# Altium PCB LeBot.PcbDoc (part 1 of 2)
Units mm, origin at the board's own origin, x right, y up, seen from the top; angles counter-clockwise.
Board outline 72.75 x 51.14 mm, 4 copper layers (Top Layer, Low Impedance, Power, Bottom Layer), stack 0.778 mm thick; 105 components, 96 nets, 418 pads, 258 vias.
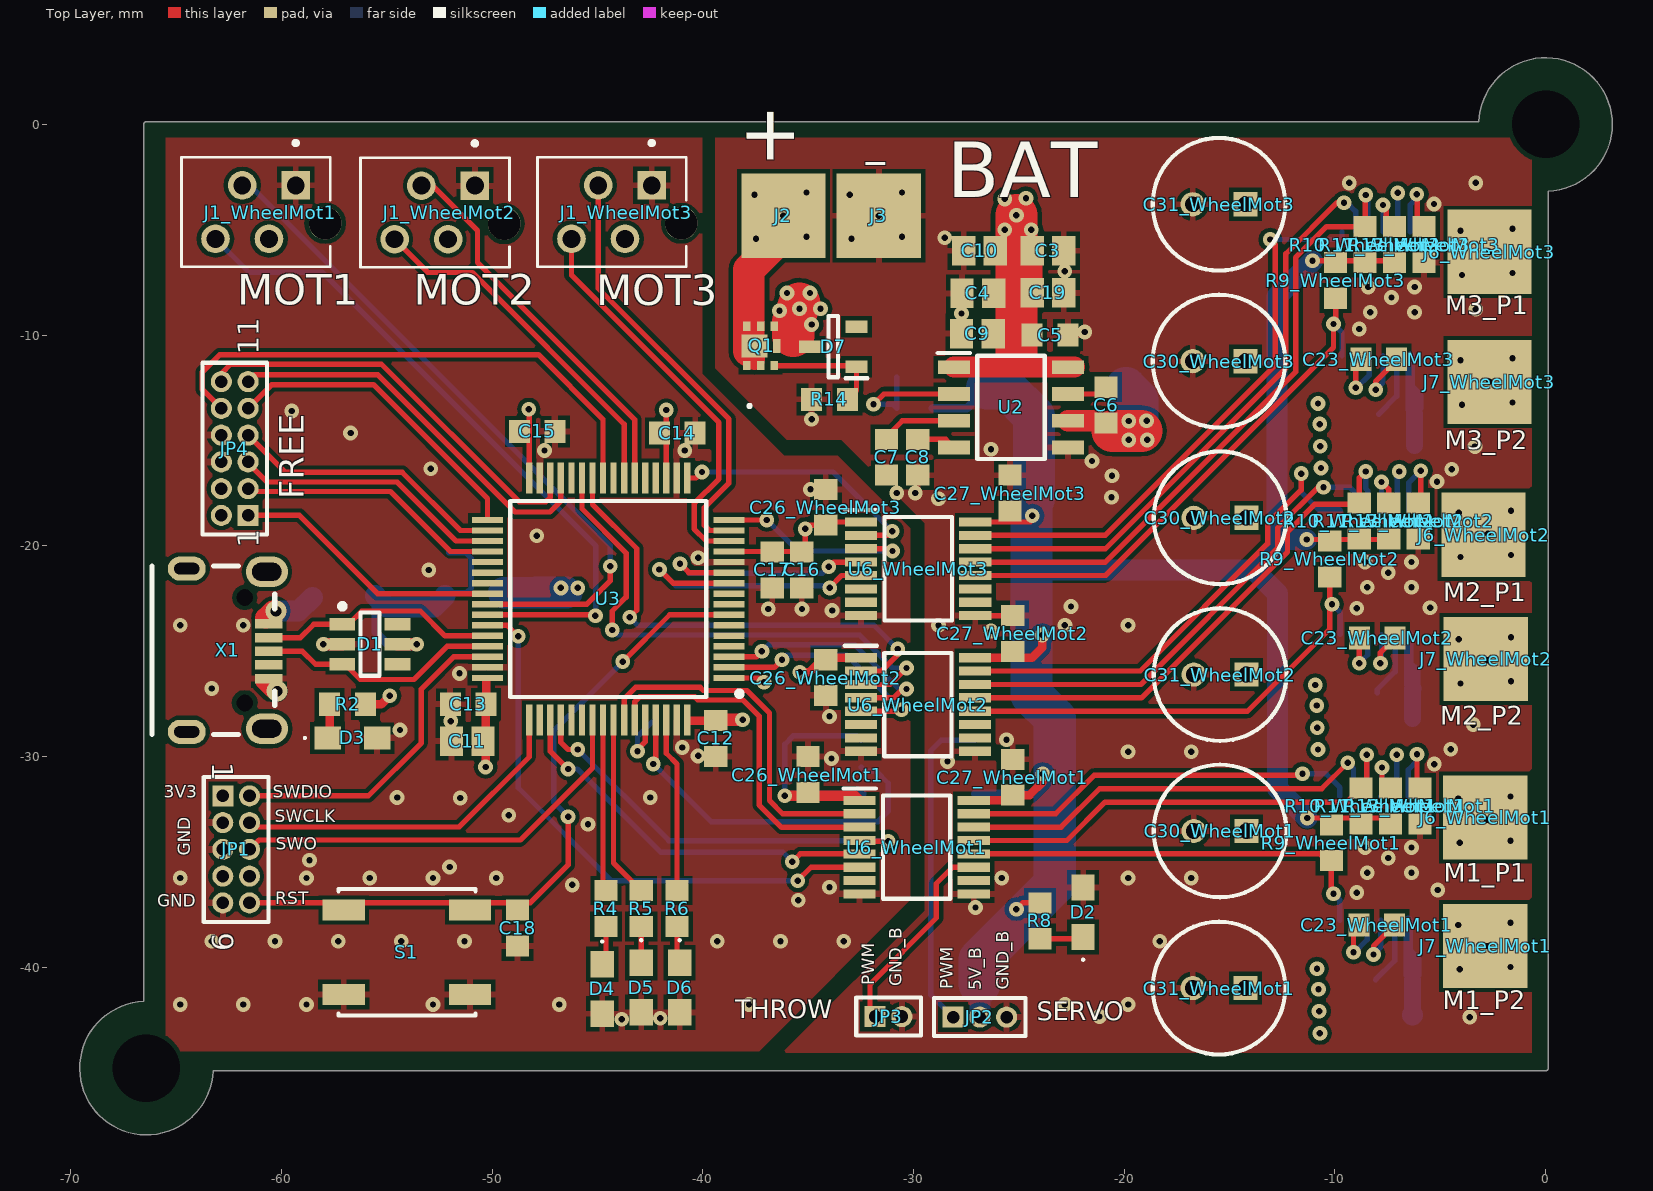
[diagram p0: Top Layer view]
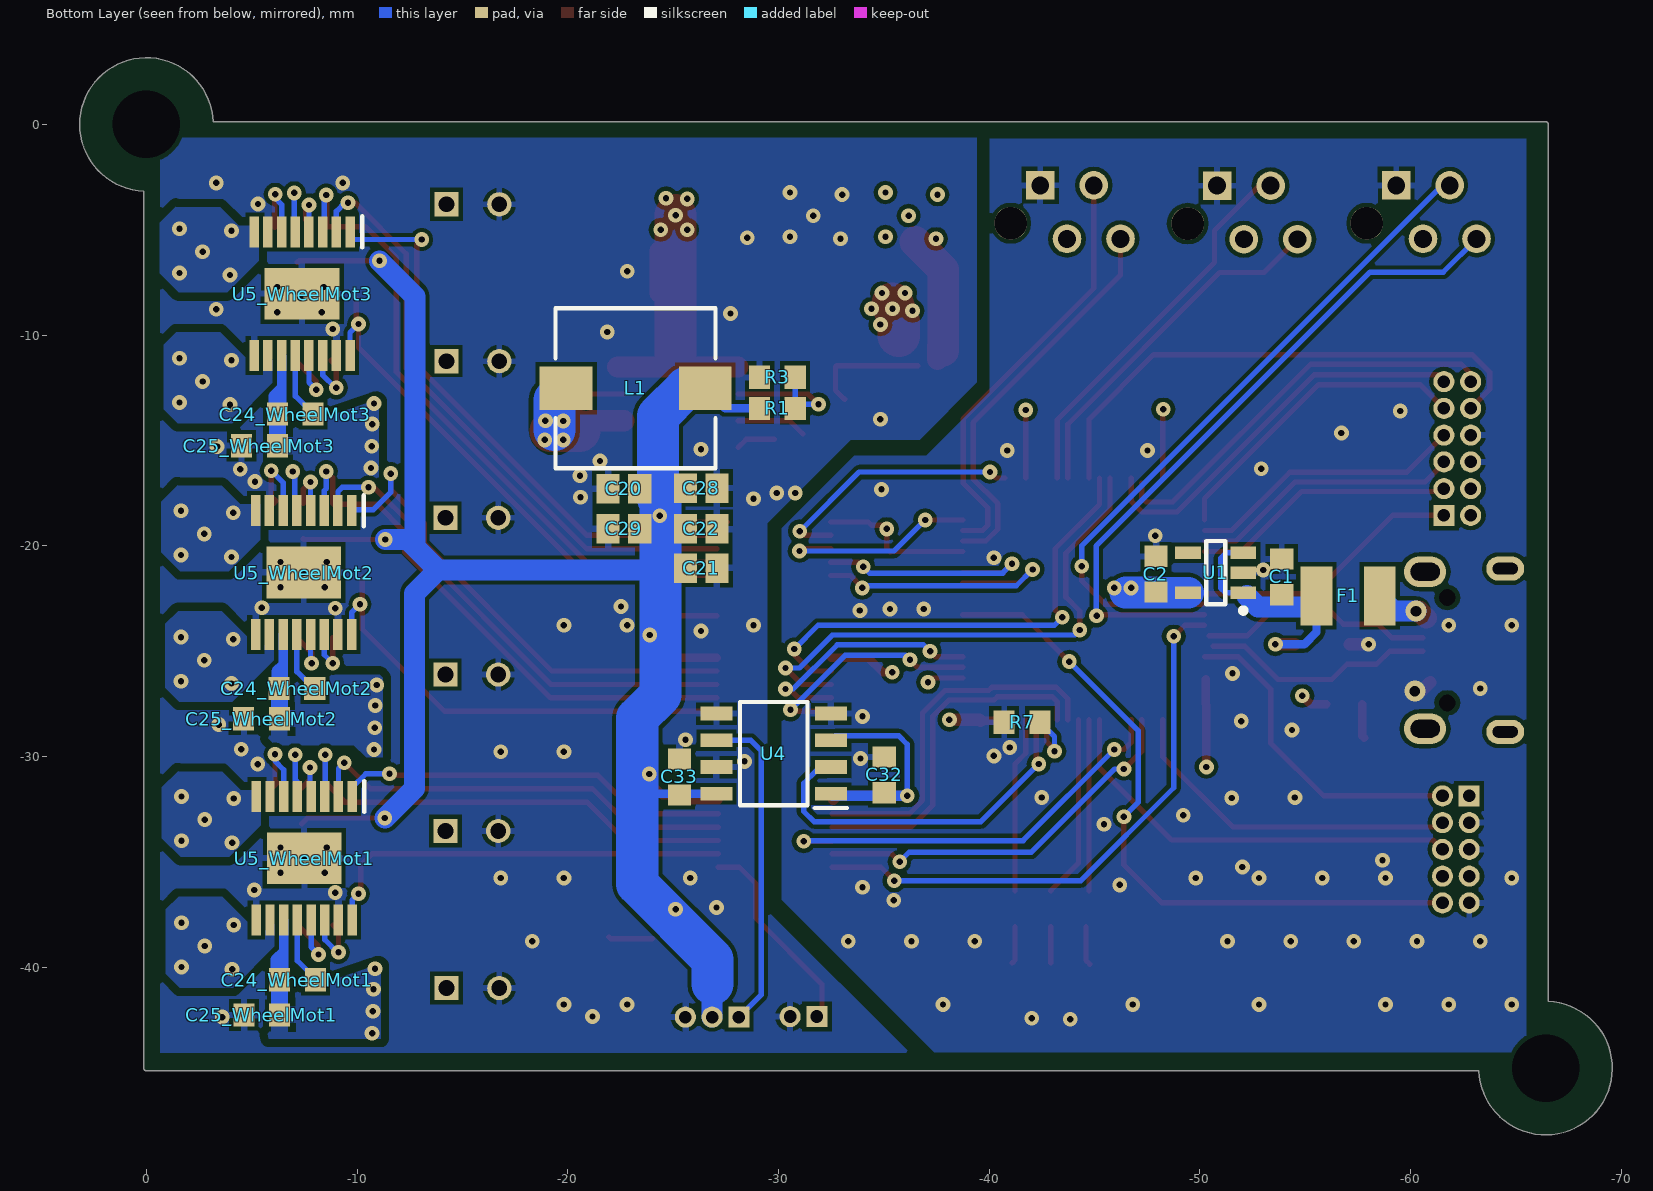
[diagram p1: Bottom Layer view, seen from below]
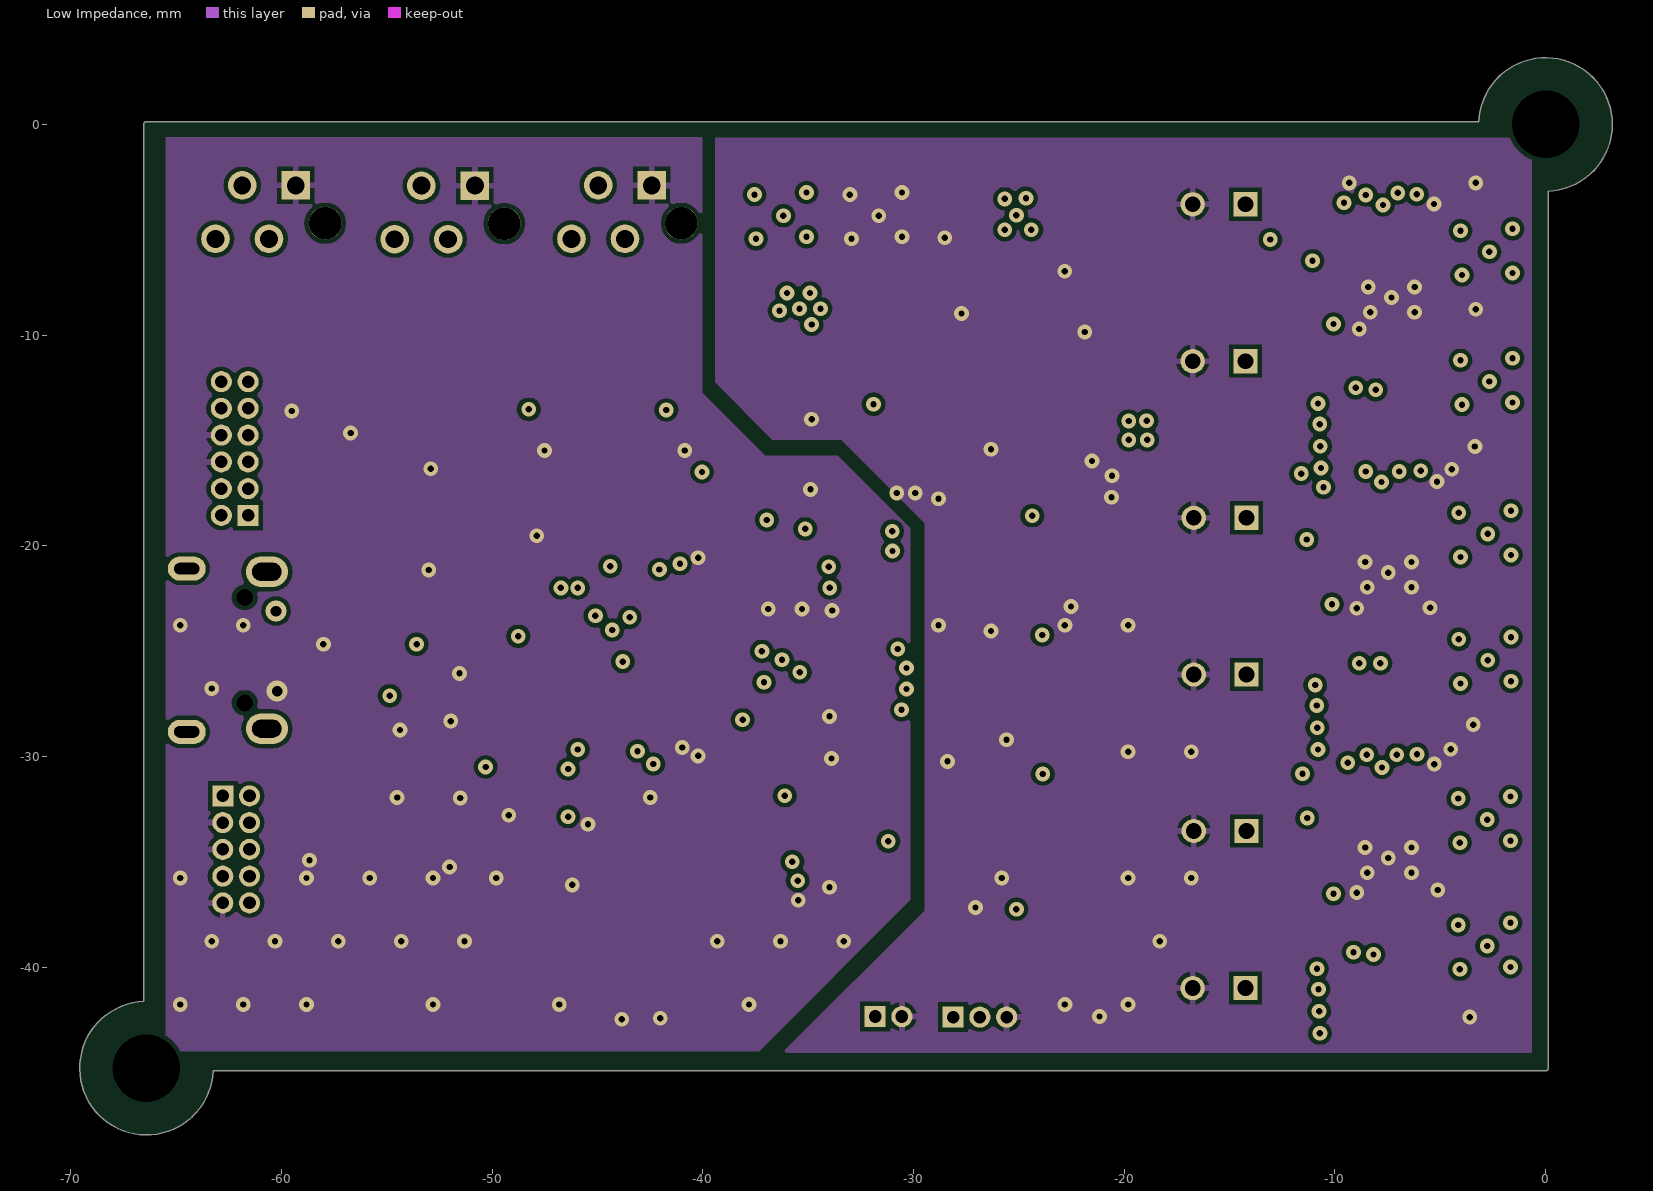
[diagram p2: Low Impedance]
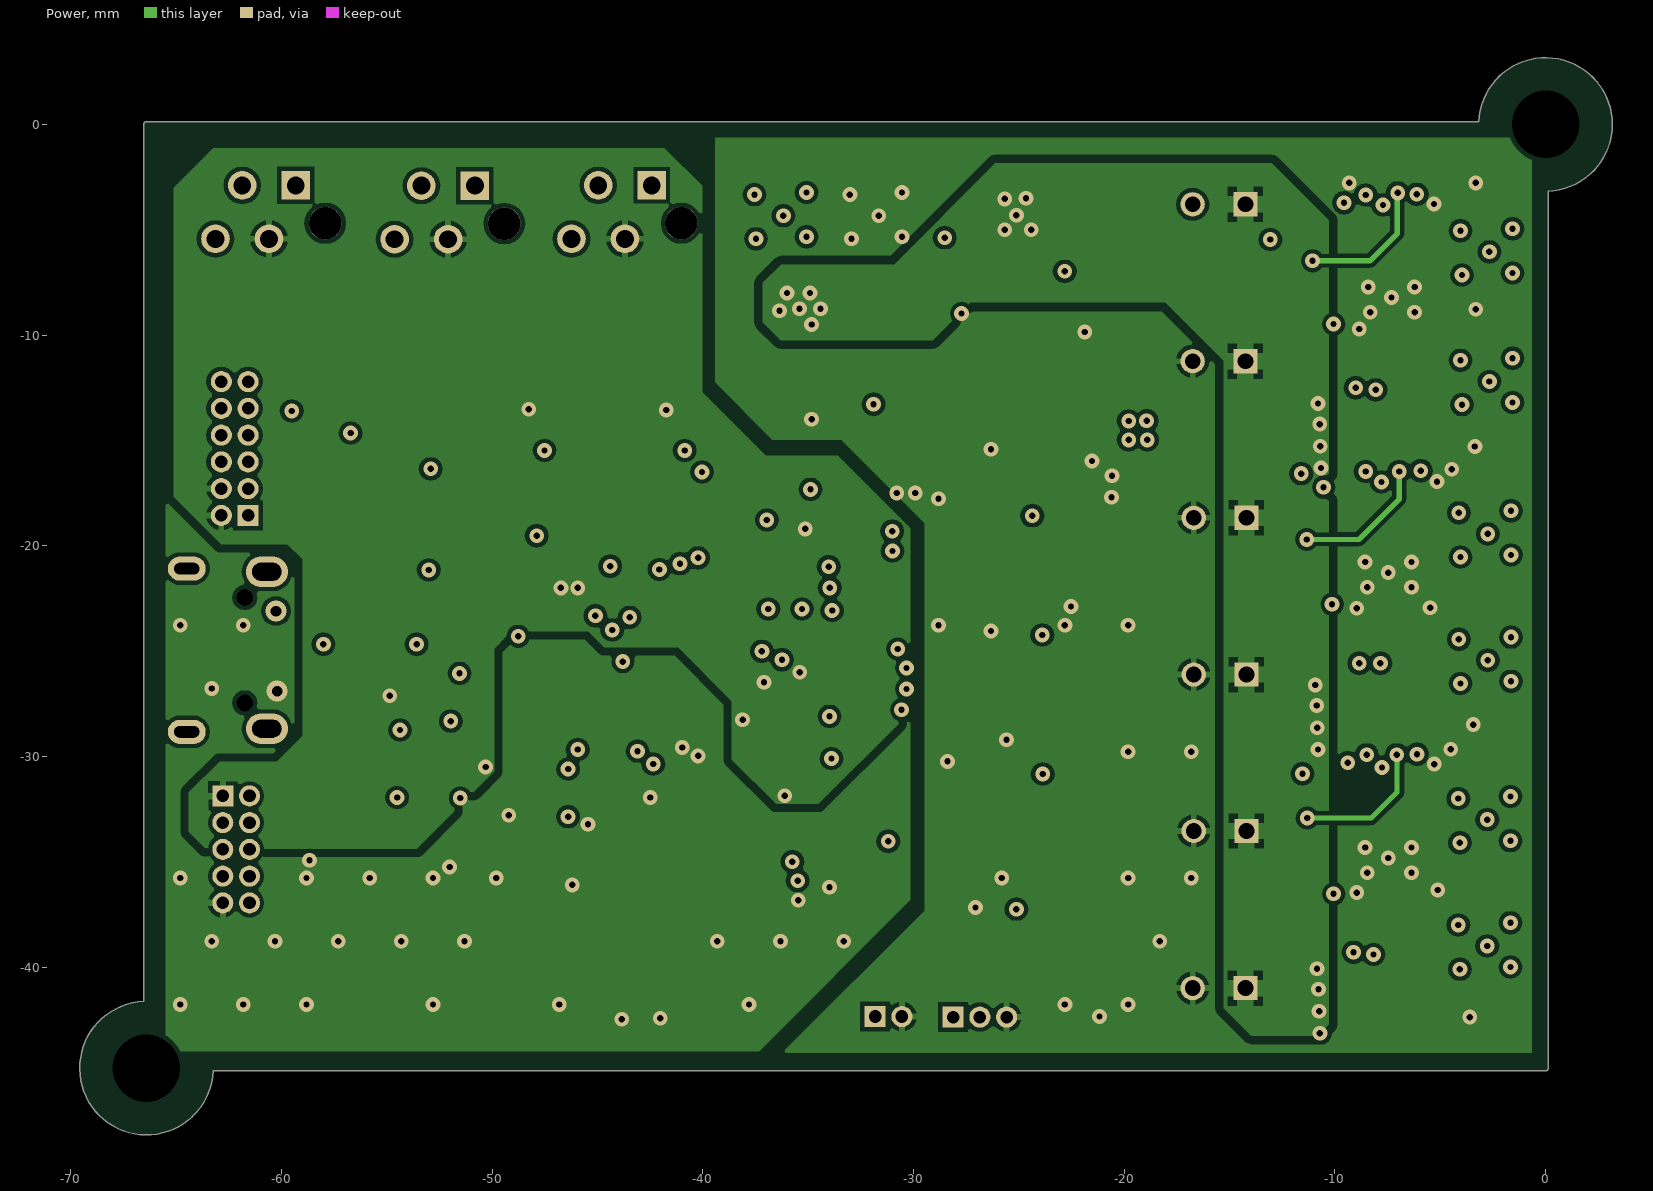
[diagram p3: Power]
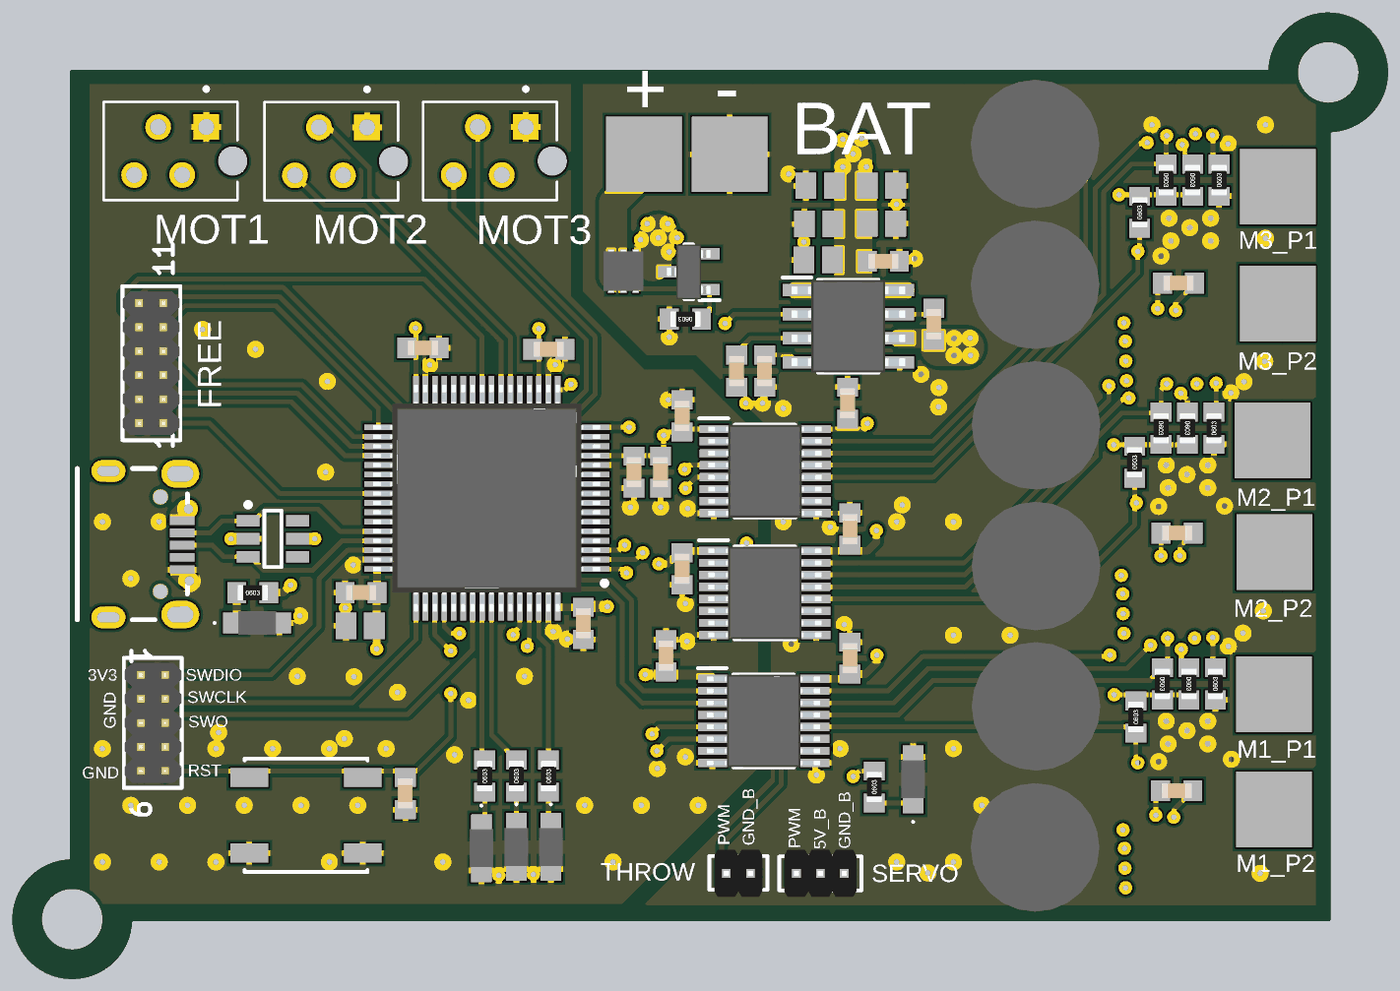
[diagram p5: 3D render of the assembled board from above, using the file's embedded part models]
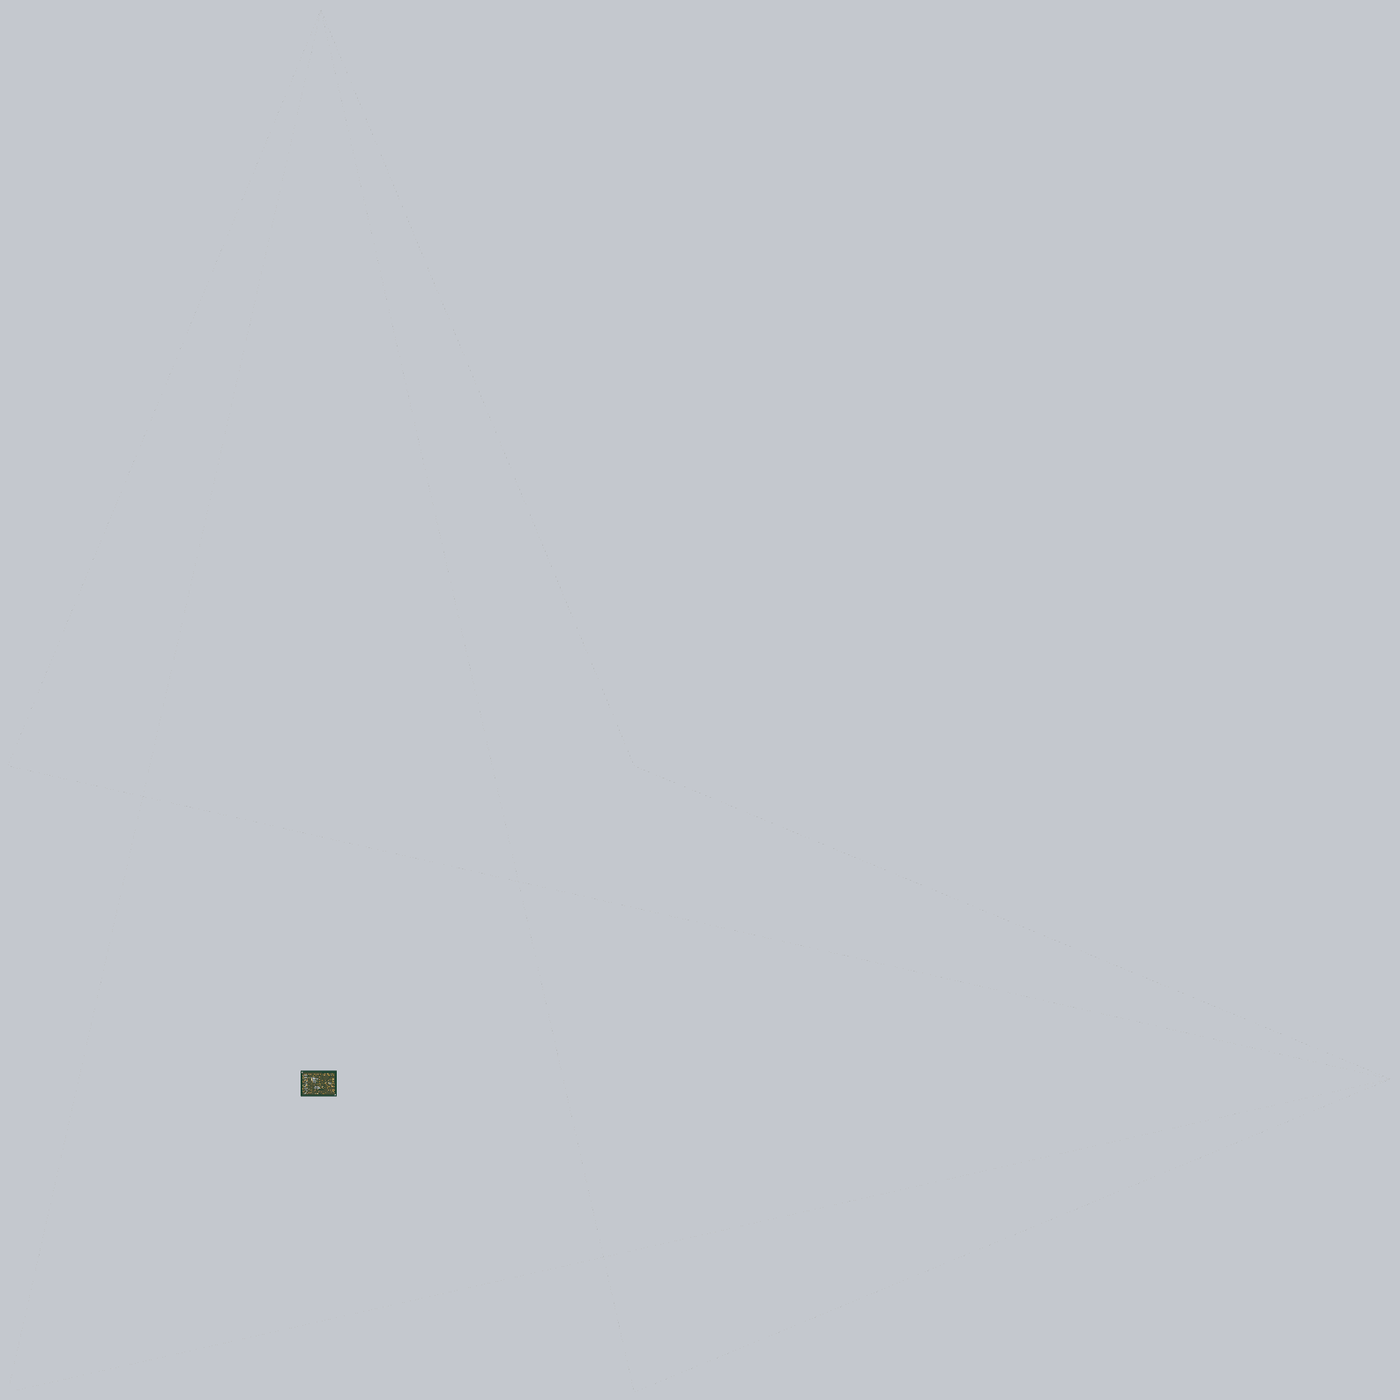
[diagram p6: 3D render of the assembled board from below, using the file's embedded part models]

## Layer stack, top to bottom
Top Solder: solder mask 0.0102, Solder Resist, Dk 3.5
Top Layer: signal copper 0.0356
Dielectric 1: core 0.254, FR-4, Dk 4.2
Low Impedance: signal copper 0.036
Dielectric 3: prepreg 0.127, Dk 4.2
Power: signal copper 0.036
Dielectric 2: core 0.254, Dk 4.2
Bottom Layer: signal copper 0.0356
Bottom Solder: solder mask 0.0102, Solder Resist, Dk 3.5

## Board outline
-66.544,-41.634 -66.544,0 cw(c-66.416,0) -66.416,0.127 -3.166,0.127 cw(c0,0) 3.169,0 cw(c0,0) 0.127,-3.166 0.127,-44.8 cw(c0,-44.8) 0,-44.927 -63.25,-44.927 cw(c-66.416,-44.8)

## Design rules (kind name [scope] priority, off if disabled: settings)
Clearance [All] p1: gap=0.2 ignorepadtopadclearanceinfootprint=TRUE except(0: Arc-Hole Track-Hole SMDPad-Hole THPad-Hole Via-Hole Fill-Hole Poly-Hole Region-Hole Text-Hole; 0.4: Fill-Fill Fill-Poly Fill-Region Poly-Poly Poly-Region Region-Region)
HoleSize [All] p1: absolutevalues=TRUE maxlimit=3 minlimit=0.2 maxpercent=80.000 minpercent=20.000
HoleToHoleClearance [All] p1: gap=0.15 allowstackedmicrovias=TRUE
MinimumAnnularRing [All] p1: minimumring=0.2
PlaneClearance [All] p1: clearance=0.5
PlaneConnect [All] p1: planeconnectstyle=Relief reliefexpansion=0.3 reliefentries=4 reliefconductorwidth=0.4 reliefairgap=0.2
PolygonConnect PolygonConnect_VIA [IsVia vs InNet('3V3')OR InNet('GND')OR InNet('BAT') OR InNet('5V') OR InNet('GND_B')] p1: connectstyle=Direct reliefconductorwidth=0.254 reliefentries=4 polygonreliefangle="90 Angle" airgapwidth=0.254
PolygonConnect PolygonConnect_BAT [InNet('BAT')] p2: thpad.connectstyle=Relief thpad.reliefconductorwidth=0.8 thpad.reliefentries=4 thpad.polygonreliefangle="90 Angle" thpad.airgapwidth=0.254 smdpad.connectstyle=Relief smdpad.reliefconductorwidth=0.8 smdpad.reliefentries=4 smdpad.polygonreliefangle="90 Angle" smdpad.airgapwidth=0.254 via.connectstyle=Direct via.reliefconductorwidth=0.254 via.reliefentries=4 via.polygonreliefangle="90 Angle" via.airgapwidth=0.254
PolygonConnect PolygonConnect_MotPow [InNet('MOT_POW_1_WheelMot1') OR InNet('MOT_POW_2_WheelMot1') OR InNet('MOT_POW_1_WheelMot2') OR InNet('MOT_POW_2_WheelMot2') OR InNet('MOT_POW_1_WheelMot3') OR InNet('MOT_POW_2_WheelMot3')] p3: thpad.connectstyle=Relief thpad.reliefconductorwidth=0.254 thpad.reliefentries=4 thpad.polygonreliefangle="90 Angle" thpad.airgapwidth=0.254 smdpad.connectstyle=Direct smdpad.reliefconductorwidth=0 smdpad.reliefentries=4 smdpad.polygonreliefangle="90 Angle" smdpad.airgapwidth=0.254 via.connectstyle=Direct via.reliefconductorwidth=0.254 via.reliefentries=4 via.polygonreliefangle="90 Angle" via.airgapwidth=0.254
PolygonConnect [All] p4: connectstyle=Relief reliefconductorwidth=0.3 reliefentries=4 polygonreliefangle="90 Angle" airgapwidth=0.2
RoomDefinition LeBot [InComponentClass('LeBot')] p1 off: confinementstyle=ConfineIn formatcopy=TRUE lockcomponents=FALSE outline 27.159,27.975 77.959,27.975 77.959,53.375 27.159,53.375
RoomDefinition WheelMot3 [InComponentClass('WheelMot3')] p2 off: confinementstyle=ConfineIn formatcopy=TRUE lockcomponents=FALSE outline 82.584,29.45 133.384,29.45 133.384,54.85 82.584,54.85
RoomDefinition WheelMot2 [InComponentClass('WheelMot2')] p3 off: confinementstyle=ConfineIn formatcopy=TRUE lockcomponents=FALSE outline -31.618,28.776 19.182,28.776 19.182,54.176 -31.618,54.176
RoomDefinition WheelMot1 [InComponentClass('WheelMot1')] p4 off: confinementstyle=ConfineIn formatcopy=TRUE lockcomponents=FALSE outline 24.6,-7.6 75.4,-7.6 75.4,17.8 24.6,17.8
RoutingCorners [All] p1: cornerstyle=45-Degree minsetback=0.2 maxsetback=2.5
RoutingVias [All] p1: holewidth=0.3 width=0.7 viastyle="Through Hole" minholewidth=0.2 minwidth=0.6 maxholewidth=3 maxwidth=4
SilkToSilkClearance [All] p1: silktosilkclearance=0.2
SilkToSolderMaskClearance [IsPad] p1: minsilkscreentomaskgap=0.2 clearancetoexposedcopper=TRUE
SolderMaskExpansion SolderMaskExpansion_VIA [IsVia] p1: expansion=-1
SolderMaskExpansion [All] p2: expansion=0.1
Width [All] p1: maxlimit=5 minlimit=0.2 preferedwidth=0.3
23 further rules are at their usual default settings.

## Classes and differential pairs
channel class WheelMotor: WheelMot1 WheelMot2 WheelMot3
component class WheelMot3: C23_WheelMot3 C24_WheelMot3 C25_WheelMot3 C26_WheelMot3 C27_WheelMot3 C30_WheelMot3 C31_WheelMot3 J1_WheelMot3 J6_WheelMot3 J7_WheelMot3 R9_WheelMot3 R10_WheelMot3 R11_WheelMot3 R13_WheelMot3 U5_WheelMot3 U6_WheelMot3
component class WheelMot2: C23_WheelMot2 C24_WheelMot2 C25_WheelMot2 C26_WheelMot2 C27_WheelMot2 C30_WheelMot2 C31_WheelMot2 J1_WheelMot2 J6_WheelMot2 J7_WheelMot2 R9_WheelMot2 R10_WheelMot2 R11_WheelMot2 R13_WheelMot2 U5_WheelMot2 U6_WheelMot2
component class WheelMot1: C23_WheelMot1 C24_WheelMot1 C25_WheelMot1 C26_WheelMot1 C27_WheelMot1 C30_WheelMot1 C31_WheelMot1 J1_WheelMot1 J6_WheelMot1 J7_WheelMot1 R9_WheelMot1 R10_WheelMot1 R11_WheelMot1 R13_WheelMot1 U5_WheelMot1 U6_WheelMot1
component class LeBot: C1 C2 C3 C4 C5 C6 C7 C8 C9 C10 C11 C12 C13 C14 C15 C16 C17 C18 C19 C20 C21 C22 C28 C29 C32 C33 D1 D2 D3 D4 D5 D6 D7 F1 J2 J3 JP1 JP2 JP3 JP4 L1 Q1 R1 R2 R3 R4 R5 R6 R7 R8 R14 S1 U1 U2 U3 U4 X1

## Components (designator, comment, footprint, x,y, rotation, side; value= is the part's Value field where it differs from the comment)
C1 "1uF*V" C0603 -53.891,-21.475 r270 bottom
C2 "1uF*V" C0603 -47.916,-21.35 r270 bottom
C3 "10uF*V" C0805 -23.619,-6 r180 top
C4 "10uF*V" C0805 -26.944,-8.025 r0 top
C5 "100nF*V" C0603 -23.519,-10 r180 top
C6 "100nF*V" C0603 -20.863,-13.325 r90 top
C7 "1uF*V" C0603 -31.28,-15.8 r90 top
C8 "10nF*V" C0603 -29.798,-15.8 r90 top
C9 "10uF*V" C0805 -26.969,-9.925 r0 top
C10 "10uF*V" C0805 -26.869,-6 r0 top
C11 "4.7uF*V" C0805 -51.191,-29.275 r0 top
C12 "100nF*V" C0603 -39.391,-29.15 r90 top
C13 "100nF*V" C0603 -51.141,-27.525 r0 top
C14 "100nF*V" C0603 -41.216,-14.65 r180 top
C15 "100nF*V" C0603 -47.866,-14.575 r180 top
C16 "1uF*V" C0603 -35.309,-21.15 r90 top
C17 "10nF*V" C0603 -36.709,-21.15 r90 top
C18 "100nF*V" C0603 -48.8,-38.15 r90 top
C19 "10uF*V" C0805 -23.619,-8 r180 top
C20 "10uF*V" C0805 -22.666,-17.29 r180 bottom
C21 "10uF*V" C0805 -26.341,-21.06 r0 bottom
C22 "10uF*V" C0805 -26.341,-19.2 r0 bottom
C23_WheelMot1 "22nF *V" C0603 -8.016,-38 r180 top (schematic designator C23)
C23_WheelMot2 "22nF *V" C0603 -7.991,-24.375 r180 top (schematic designator C23)
C23_WheelMot3 "22nF *V" C0603 -7.916,-11.15 r180 top (schematic designator C23)
C24_WheelMot1 "100nF *V" C0603 -7.166,-40.6 r0 bottom (schematic designator C24)
C24_WheelMot2 "100nF *V" C0603 -7.141,-26.775 r0 bottom (schematic designator C24)
C24_WheelMot3 "100nF *V" C0603 -7.066,-13.75 r0 bottom (schematic designator C24)
C25_WheelMot1 "100nF *V" C0603 -5.475,-42.275 r180 bottom (schematic designator C25)
C25_WheelMot2 "100nF *V" C0603 -5.466,-28.215 r180 bottom (schematic designator C25)
C25_WheelMot3 "100nF *V" C0603 -5.366,-15.25 r180 bottom (schematic designator C25)
C26_WheelMot1 "100nF *V" C0603 -35.016,-30.862 r270 top (schematic designator C26)
C26_WheelMot2 "100nF *V" C0603 -34.166,-26.262 r90 top (schematic designator C26)
C26_WheelMot3 "100nF *V" C0603 -34.166,-18.175 r270 top (schematic designator C26)
C27_WheelMot1 "100nF *V" C0603 -25.291,-30.987 r270 top (schematic designator C27)
C27_WheelMot2 "100nF *V" C0603 -25.291,-24.162 r270 top (schematic designator C27)
C27_WheelMot3 "100nF *V" C0603 -25.416,-17.5 r270 top (schematic designator C27)
C28 "10uF*V" C0805 -26.341,-17.26 r0 bottom
C29 "10uF*V" C0805 -22.666,-19.2 r180 bottom
C30_WheelMot1 "100uF" CAPPRD250W55D630H1220 -14.2,-33.54 r180 top (schematic designator C30)
C30_WheelMot2 "100uF" CAPPRD250W55D630H1220 -14.2,-18.673 r180 top (schematic designator C30)
C30_WheelMot3 "100uF" CAPPRD250W55D630H1220 -14.25,-11.238 r180 top (schematic designator C30)
C31_WheelMot1 "100uF" CAPPRD250W55D630H1220 -14.25,-41 r180 top (schematic designator C31)
C31_WheelMot2 "100uF" CAPPRD250W55D630H1220 -14.2,-26.115 r180 top (schematic designator C31)
C31_WheelMot3 "100uF" CAPPRD250W55D630H1220 -14.25,-3.79 r180 top (schematic designator C31)
C32 "100nF*V" C0603 -35.025,-30.875 r270 bottom
C33 "100nF*V" C0603 -25.3,-30.975 r270 bottom
D1 "USBLC6-4" SOT-236 -55.806,-24.675 r0 top
D2 "=\"PartNumber\"" LED_0805 -21.95,-37.4 r90 top
D3 "=\"PartNumber\"" LED_0805 -56.641,-29.125 r0 top
D4 "=\"PartNumber\"" LED_0805 -44.779,-41.04 r270 top
D5 "=\"PartNumber\"" LED_0805 -42.929,-40.975 r270 top
D6 "=\"PartNumber\"" LED_0805 -41.104,-40.975 r270 top
D7 "*" SOT23-Zener -33.813,-10.55 r180 top
F1 "#NAME?" F1210 -57.041,-22.375 r0 bottom
J1_WheelMot1 "215079-4" TE_215079-4 -59.33,-2.891 r0 top (schematic designator J1)
J1_WheelMot2 "215079-4" TE_215079-4 -50.826,-2.909 r0 top (schematic designator J1)
J1_WheelMot3 "215079-4" TE_215079-4 -42.43,-2.891 r0 top (schematic designator J1)
J2 "Connection_pad" Wire_Pad#1 -36.086,-4.331 r90 top
J3 "Connection_pad" Wire_Pad#1 -31.648,-4.425 r0 top
J6_WheelMot1 "Connection_pad" Wire_Pad#1 -2.772,-32.9 r90 top (schematic designator J6)
J6_WheelMot2 "Connection_pad" Wire_Pad#1 -2.847,-19.475 r90 top (schematic designator J6)
J6_WheelMot3 "Connection_pad" Wire_Pad#2 -2.205,-3.196 r90 top (schematic designator J6)
J7_WheelMot1 "Connection_pad" Wire_Pad#1 -2.772,-39 r90 top (schematic designator J7)
J7_WheelMot2 "Connection_pad" Wire_Pad#1 -2.747,-25.375 r90 top (schematic designator J7)
J7_WheelMot3 "Connection_pad" Wire_Pad#1 -2.572,-12.225 r90 top (schematic designator J7)
JP1 "PIN_2x5" 1.27_2X5H -62.791,-31.875 r270 top
JP2 "PIN_1x3" 1.27_1X3H -28.124,-42.375 r0 top
JP3 "PIN_1x2" 1.27_1X2H -31.824,-42.35 r0 top
JP4 "PIN_2x6" 1.27_2X6H -61.591,-18.56 r90 top
L1 "Inductor" L73 -23.219,-12.525 r180 bottom
Q1 "BUK4D38-20P" PMPB12EPX -36.488,-10.515 r90 top
R1 "124k" R0603 -29.948,-13.48 r0 bottom
R2 "280R" R0603 -56.866,-27.525 r0 top
R3 "22k1" R0603 -29.948,-12 r180 bottom
R4 "700R" R0603 -44.604,-37.225 r90 top
R5 "700R" R0603 -42.929,-37.225 r90 top
R6 "700R" R0603 -41.229,-37.225 r90 top
R7 "10k" R0603 -41.566,-28.375 r180 bottom
R8 "620R" R0603 -24.004,-37.805 r90 top
R9_WheelMot1 "10k" R0603 -10.166,-34.1 r90 top (schematic designator R9)
R9_WheelMot2 "10k" R0603 -10.241,-20.625 r90 top (schematic designator R9)
R9_WheelMot3 "10k" R0603 -9.966,-7.4 r90 top (schematic designator R9)
R10_WheelMot1 "10k" R0603 -8.766,-32.35 r270 top (schematic designator R10)
R10_WheelMot2 "10k" R0603 -8.841,-18.825 r270 top (schematic designator R10)
R10_WheelMot3 "10k" R0603 -8.566,-5.7 r270 top (schematic designator R10)
R11_WheelMot1 "10k" R0603 -7.366,-32.35 r270 top (schematic designator R11)
R11_WheelMot2 "10k" R0603 -7.441,-18.825 r270 top (schematic designator R11)
R11_WheelMot3 "10k" R0603 -7.166,-5.7 r270 top (schematic designator R11)
R13_WheelMot1 "3k2" R0603 -5.966,-32.35 r90 top (schematic designator R13)
R13_WheelMot2 "3k2" R0603 -6.041,-18.825 r90 top (schematic designator R13)
R13_WheelMot3 "3k2" R0603 -5.766,-5.7 r90 top (schematic designator R13)
R14 "100k" R0603 -33.991,-13.05 r180 top
S1 "EVQQ" EVQQ -54.05,-39.3 r0 top
U1 "MIC5504*" SOT-235 -50.756,-21.275 r0 bottom
U2 "TPS54227DDAR" SOIC127P600X175-8N -25.375,-13.43 r0 top
U3 "STM32F103R8T6" QFP50P1200X1200X160-64N -44.491,-22.525 r180 top locked
U4 "ISO721DR" SOIC127P600X175-8N -29.779,-29.872 r0 bottom
U5_WheelMot1 "DRV8874PWPR" SOP65P640X120-17N -7.491,-34.838 r270 bottom (schematic designator U5)
U5_WheelMot2 "DRV8874PWPR" SOP65P640X120-17N -7.466,-21.275 r270 bottom (schematic designator U5)
U5_WheelMot3 "DRV8874PWPR" SOP65P640X120-17N -7.391,-8.038 r270 bottom (schematic designator U5)
U6_WheelMot1 "SI8660BB-B-IU_1" SOP64P600X175-16N -29.852,-34.309 r0 top (schematic designator U6)
U6_WheelMot2 "SI8660BB-B-IU_1" SOP64P600X175-16N -29.791,-27.537 r0 top (schematic designator U6)
U6_WheelMot3 "SI8660BB-B-IU_1" SOP64P600X175-16N -29.78,-21.094 r0 top (schematic designator U6)
X1 "USB" "USB MicroB Type 2.0" -63.241,-25.01 r270 top

## Footprints (in the part's own frame and the unit in brackets; to place one, negate y for a bottom-side part, rotate by r counter-clockwise, add the part's x,y. Pads: shape width x height; smd on the part's side, far side on the other; paste and mask are expansions set on the pad)
1.27_1X2H [mm] "1.27mm header, 1x2 pins"
  rect 1x1 hole 0.6: 1(0,0)
  round 1 hole 0.6: 2(1.27,0)
  silkscreen extent -0.9,-0.9 2.17,0.9, body extent -0.64,-1.27 1.9,1.23, height 5.34
1.27_1X3H [mm] "1.27mm header, 1x3 pins"
  rect 1x1 hole 0.6: 1(0,0)
  round 1 hole 0.6: 2(1.27,0) 3(2.54,0)
  silkscreen extent -0.9,-0.9 3.44,0.9, body extent -0.63,-1.25 3.18,1.25, height 5.34
1.27_2X5H [mm] "1.27mm header, 2x5 pins"
  rect 1x1 hole 0.6: 1(0,0)
  round 1 hole 0.6: 2(0,1.27) 3(1.27,0) 4(1.27,1.27) 5(2.54,0) 6(2.54,1.27) 7(3.81,0) 8(3.81,1.27) 9(5.08,0) 10(5.08,1.27)
  silkscreen extent -0.9,-0.9 5.98,2.17, body extent -0.63,-0.85 5.72,2.15, height 4.7
1.27_2X6H [mm] "1.27mm header, 2x6 pins"
  rect 1x1 hole 0.6: 1(0,0)
  round 1 hole 0.6: 2(0,1.27) 3(1.27,0) 4(1.27,1.27) 5(2.54,0) 6(2.54,1.27) 7(3.81,0) 8(3.81,1.27) 9(5.08,0) 10(5.08,1.27) 11(6.35,0) 12(6.35,1.27)
  silkscreen extent -0.9,-0.9 7.25,2.17, body extent -0.63,-0.85 6.99,2.15, height 4.7
C0603 [mm] "0603 ceramic capacitor"
  rect 1x1.1 smd: 1(-0.85,0) 2(0.85,0)
  body extent -0.8,-0.4 0.8,0.4, height 0.8
C0805 [mm] "Chip Capacitor, Body 2.0x1.3mm, IPC High Density"
  rect 1.1x1.4 smd: 1(-0.75,0) 2(0.75,0)
  body extent -1.1,-0.72 1.1,0.72, height 1.4
CAPPRD250W55D630H1220 [mm]
  rect 1.15x1.15 hole 0.75: 1(0,0)
  round 1.15 hole 0.75: 2(2.5,0)
  silkscreen extent -1.9,-3.15 4.4,3.15, body extent -2.15,-3.4 4.65,3.4, height 12.2
EVQQ [mm] "Switch, 2-Leads, Body 6,50x6,00mm, Panasonic EVQQ/EVQP"
  rect 2x1 smd: 1(-3,2) 1(3,2) 2(-3,-2) 2(3,-2)
  silkscreen extent -3.25,-3 3.25,3, body extent -3.25,-3 3.25,3, height 3
F1210 [mm]
  rect 1.5x2.8 smd: 1(-1.5,0) 2(1.5,0)
  body extent -1.61,-1.29 1.61,1.29, height 0.67
L73 [mm] "Shielded Inductor, 2-Leads, Body 7,30x7,30mm"
  rect 2.5x2.05 smd: 1(-3.3,0) 2(3.3,0)
  silkscreen extent -3.8,-3.8 3.8,3.8, body extent -3.76,-3.65 3.66,3.65, height 4.55
LED_0805 [mm]
  rect 1.25x1.1 smd: 1(-1.175,0) 2(1.175,0)
  silkscreen extent -2.3,-0.05 -2.2,0.05, body extent -1,-0.62 1,0.63, height 0.95
PMPB12EPX [mm]
  rect 0.66x0.35 smd: 1(0,0)
  rect 0.43x0.35 smd: 1(0.935,0.125) 2(-0.935,0.125) 3(-0.935,0.775) 3(-0.935,1.425) 3(0.935,0.775) 3(0.935,1.425)
  rect 1.1x1.25 smd: 3(0,1.06)
  silkscreen extent -2.9,1.25 -2.8,1.35, body extent -1.12,-0.27 1.11,1.83, height 0.75
QFP50P1200X1200X160-64N [mm]
  rect 1.475x0.3 smd: 1(-5.738,3.75) 2(-5.738,3.25) 3(-5.738,2.75) 4(-5.738,2.25) 5(-5.738,1.75) 6(-5.738,1.25) 7(-5.738,0.75) 8(-5.738,0.25) 9(-5.738,-0.25) 10(-5.738,-0.75) 11(-5.738,-1.25) 12(-5.738,-1.75) 13(-5.738,-2.25) 14(-5.738,-2.75) 15(-5.738,-3.25) 16(-5.738,-3.75) 33(5.738,-3.75) 34(5.738,-3.25) 35(5.738,-2.75) 36(5.738,-2.25) 37(5.738,-1.75) 38(5.738,-1.25) 39(5.738,-0.75) 40(5.738,-0.25) 41(5.738,0.25) 42(5.738,0.75) 43(5.738,1.25) 44(5.738,1.75) 45(5.738,2.25) 46(5.738,2.75) 47(5.738,3.25) 48(5.738,3.75)
  rect 0.3x1.475 smd: 17(-3.75,-5.738) 18(-3.25,-5.738) 19(-2.75,-5.738) 20(-2.25,-5.738) 21(-1.75,-5.738) 22(-1.25,-5.738) 23(-0.75,-5.738) 24(-0.25,-5.738) 25(0.25,-5.738) 26(0.75,-5.738) 27(1.25,-5.738) 28(1.75,-5.738) 29(2.25,-5.738) 30(2.75,-5.738) 31(3.25,-5.738) 32(3.75,-5.738) 49(3.75,5.738) 50(3.25,5.738) 51(2.75,5.738) 52(2.25,5.738) 53(1.75,5.738) 54(1.25,5.738) 55(0.75,5.738) 56(0.25,5.738) 57(-0.25,5.738) 58(-0.75,5.738) 59(-1.25,5.738) 60(-1.75,5.738) 61(-2.25,5.738) 62(-2.75,5.738) 63(-3.25,5.738) 64(-3.75,5.738)
  silkscreen extent -6.35,-4.65 4.65,4.65, body extent -6,-6 6,6, height 1.6
R0603 [mm] "0603 resistor"
  rect 1x1.1 smd: 1(-0.85,0) 2(0.85,0)
  body extent -0.8,-0.4 0.8,0.4, height 0.45
SOIC127P600X175-8N [mm]
  rect 1.525x0.65 smd: 1(-2.712,1.905) 2(-2.712,0.635) 3(-2.712,-0.635) 4(-2.712,-1.905) 5(2.712,-1.905) 6(2.712,-0.635) 7(2.712,0.635) 8(2.712,1.905)
  silkscreen extent -3.47,-2.45 1.6,2.58, body extent -3,-2.45 3,2.45, height 1.75
SOP64P600X175-16N [mm]
  rect 1.528x0.435 smd: 1(-2.711,2.222) 2(-2.711,1.588) 3(-2.711,0.952) 4(-2.711,0.318) 5(-2.711,-0.318) 6(-2.711,-0.952) 7(-2.711,-1.588) 8(-2.711,-2.222) 9(2.711,-2.222) 10(2.711,-1.588) 11(2.711,-0.952) 12(2.711,-0.318) 13(2.711,0.318) 14(2.711,0.952) 15(2.711,1.588) 16(2.711,2.222)
  silkscreen extent -3.47,-2.45 1.6,2.79, body extent -3,-2.45 3,2.45, height 1.75
SOP65P640X120-17N [mm]
  rect 1.475x0.45 smd: 1(-2.938,2.275) 2(-2.938,1.625) 3(-2.938,0.975) 4(-2.938,0.325) 5(-2.938,-0.325) 6(-2.938,-0.975) 7(-2.938,-1.625) 8(-2.938,-2.275) 9(2.938,-2.275) 10(2.938,-1.625) 11(2.938,-0.975) 12(2.938,-0.325) 13(2.938,0.325) 14(2.938,0.975) 15(2.938,1.625) 16(2.938,2.275)
  rect 2.46x3.55 smd: 17(0,0)
  silkscreen extent -3.67,2.85 -2.2,2.85, body extent -3.2,-2.5 3.2,2.5, height 1.2
SOT23-Zener [mm] "SOT95P230X110-3N"
  rect 1.05x0.6 smd: 1(-1.1,0.95) 2(1.1,0) 3(-1.1,-0.95)
  silkscreen extent -1.63,-1.45 0.23,1.5, body extent -1.15,-1.45 1.15,1.45, height 1.1
SOT-235 [mm] "SOT23, 5-Leads, Body 2,90x2,75mm, Pitch 0,95mm"
  rect 1.22x0.6 smd: 1(-1.31,0.95) 2(-1.31,0) 3(-1.31,-0.95) 4(1.31,-0.95) 5(1.31,0.95)
  silkscreen extent -1.43,-1.5 0.45,1.92, body extent -0.85,-1.5 0.85,1.5, height 1.1
SOT-236 [mm] "SOT23, 6-Leads, Body 2,90x2,75mm, Pitch 0,95mm"
  rect 1.22x0.6 smd: 1(-1.31,0.95) 2(-1.31,0) 3(-1.31,-0.95) 4(1.31,-0.95) 5(1.31,0) 6(1.31,0.95)
  silkscreen extent -1.43,-1.5 0.45,1.92, body extent -0.85,-1.5 0.85,1.5, height 1.1
TE_215079-4 [mm]
  rect 1.358x1.358 hole 0.85: 1(0,0)
  round 1.358 hole 0.85: 2(-1.27,-2.54) 3(-2.54,0) 4(-3.81,-2.54)
  round 1.55 hole 1.55 unplated: ""(1.4,-1.8)
  silkscreen extent -5.43,-3.87 1.65,2.11
"USB MicroB Type 2.0" [mm] "629105150521, Wurth Elektronik, Micro 2.0 Type B, 5 pins"
  round 0 hole 0.8: 7(-2.55,1.49) 7(2.45,1.49)
  rect 0.45x1.3 smd: D+(0,2.64) D-(-0.65,2.64) GND(1.3,2.64) ID(0.65,2.64) VCC(-1.3,2.64)
  oval 1.15x1.8 hole 0.55 slot 1.2 at 90 deg: ""(-3.925,-1.26) ""(3.825,-1.26)
  oval 1.45x2 hole 0.85 slot 1.4 at 90 deg: ""(-3.775,2.54) ""(3.675,2.54)
  silkscreen extent -4.05,-2.91 3.95,2.92, body extent 3.96,-3.85 4.76,-2.65, height 0.25
Wire_Pad#1 [mm] "Pad for soldering wires"
  rect 4x4 smd: 1(0,0.094)
Wire_Pad#2 [mm] "Pad for soldering wires"
  rect 4x4 smd: 1(-2.854,0.461)

## Part data
C1 C2 C7 C16: library part Capacitor, "Ceramic capacitor", Capacitance=1uF, Voltage rating=*V, ComponentLinknDescription=Datasheet, Note=C0603, Type=MLCC
C3 C4 C9 C10 C19 C20 C21 C22 C28 C29: library part Capacitor, "Ceramic capacitor", Capacitance=10uF, Voltage rating=*V, ComponentLinknDescription=Datasheet, Note=C0805, Type=MLCC
C5 C6 C12 C13 C14 C15 C18 C24_WheelMot1 C24_WheelMot2 C24_WheelMot3 C25_WheelMot1 C25_WheelMot2 C25_WheelMot3 C26_WheelMot1 C26_WheelMot2 C26_WheelMot3 C27_WheelMot1 C27_WheelMot2 C27_WheelMot3 C32 C33: library part Capacitor, "Ceramic capacitor", Capacitance=100nF, Voltage rating=*V, ComponentLinknDescription=Datasheet, Type=MLCC
  C5 C6 C12 C13 C14 C15 C18 C32 C33: Note=C0603
  C24_WheelMot1 C24_WheelMot2 C24_WheelMot3 C25_WheelMot1 C25_WheelMot2 C25_WheelMot3 C26_WheelMot1 C26_WheelMot2 C26_WheelMot3 C27_WheelMot1 C27_WheelMot2 C27_WheelMot3: Note=CurrentFootprint
C8 C17: library part Capacitor, "Ceramic capacitor", Capacitance=10nF, Voltage rating=*V, ComponentLinknDescription=Datasheet, Note=C0603, Type=MLCC
C11: library part Capacitor, "Ceramic capacitor", Capacitance=4.7uF, Voltage rating=*V, ComponentLinknDescription=Datasheet, Note=C0805, Type=MLCC
C23_WheelMot1 C23_WheelMot2 C23_WheelMot3: library part Capacitor, "Ceramic capacitor", Capacitance=22nF, Voltage rating=*V, ComponentLinknDescription=Datasheet, Note=CurrentFootprint, Type=MLCC
C30_WheelMot1 C30_WheelMot2 C30_WheelMot3 C31_WheelMot1 C31_WheelMot2 C31_WheelMot3: library part EEUFC1E101S, "Capacitor Polarised", Capacitance=100uF
D1: "USB ESD Protection", Manufacturer="ST Microelectronics", ComponentLinknDescription=Datasheet, Part number=USBLC6-4, Space heritage=false, Verified=false
D2 D3: library part LED, "Light Emitting Diode", Colour=Orange, Forward Current=20mA, Forward Voltage=2.1V, Part number=MC011368, Power dissipation=false, ComponentLinknDescription=Datasheet, Farnell Order Nr=3015159, Space heritage=false
D4 D5 D6: library part LED, "Light Emitting Diode", Colour=Green, Forward Current=2mA, Forward Voltage=1.9V, Part number=KP-2012LSGC, Power dissipation=false, ComponentLinknDescription=Datasheet, Farnell Order Nr=2463991, Space heritage=false
D7: library part "Zener Diode"
F1: library part Fuse, "Fuse", Carrying current=*A, Initial resistance=*R, Operating Voltage=*V, ComponentLinknDescription=Datasheet, Holding current=*A, Note=*AF1210, Tripping current=*A
J1_WheelMot1 J1_WheelMot2 J1_WheelMot3: "4 Position Receptacle Connector Through Hole", Package="SMD-6 Omron Electronics", Availability=Unavailable, EU_RoHS_Compliance=Compliant, MF="TE Connectivity", MP=215079-4, Price=None, SnapEDA_Link=https://www.snapeda.com/parts/215079-4/TE%20Connectivity%20AMP%20Connectors/view-part/2366486/?ref=snap, TE_purchase_URL=https://www.te.com/usa-en/product-215079-4.html?te_bu=Cor&te_type=disp&te_campaign=seda_glo_cor-seda-global-disp-prtnr-fy19-seda-model-bom-cta_sma-317_1&elqCampaignId=32493
L1: DC resistance=*R, Inductance=4.7uH, RMS current=*A, Self resonant frequency=*Hz, ComponentLinknDescription=Datasheet, Note=4.7uHL73, Saturation current=*A
Q1: library part "P-Channel MOSFET", "P-Channel MOSFET", Drain Current=-18A, DS Breakdown Volt=-20V, GS breakdown Volt=12V/-12V, Datasheet=https://eu.mouser.com/datasheet/2/916/BUK4D38-20P-1880069.pdf, Farnell Order Nr=3526152, Mouser Order Nr=771-BUK4D38-20PX, PartNumber=BUK4D38-20P, rDSon=30mOhm
R1 R2 R3 R4 R5 R6 R7 R8 R9_WheelMot1 R9_WheelMot2 R9_WheelMot3 R10_WheelMot1 R10_WheelMot2 R10_WheelMot3 R11_WheelMot1 R11_WheelMot2 R11_WheelMot3 R13_WheelMot1 R13_WheelMot2 R13_WheelMot3 R14: library part Resistor, "Resistor", Power rating=*mW, Temp coefficient=*ppm, Voltage rating=*V, ComponentLinknDescription=Datasheet, Precision=*%
  R1: Note=R0603, Resistance=124k
  R2: Note=R0603, Resistance=280R
  R3: Note=R0603, Resistance=22k1
  R4 R5 R6: Note=R0603, Resistance=700R
  R7: Note=R0603, Resistance=10k
  R8: Note=R0603, Resistance=620R
  R9_WheelMot1 R9_WheelMot2 R9_WheelMot3 R10_WheelMot1 R10_WheelMot2 R10_WheelMot3 R11_WheelMot1 R11_WheelMot2 R11_WheelMot3: Note=CurrentFootprint, Resistance=10k
  R13_WheelMot1 R13_WheelMot2 R13_WheelMot3: Note=CurrentFootprint, Resistance=3k2
  R14: Note=R0603, Resistance=100k
S1: "Switch", Manufacturer=Panasonic, ComponentLinknDescription=Datasheet, Drawn by="Erik Ilbis", Part number=EVQQ, Space heritage=false, Verified=false
U1: library part MIC5504, "Low-dropout voltage regulator", Current rating="300 mA", Input Voltage="2V5 to 5V5", Manufacturer=Microchip/Micrel, Accuracy=2%, ComponentLink1Description=Datasheet, ComponentLink1URL=https://www.mouser.ee/datasheet/2/268/MIC550X-1082389.pdf, Drawn by="Roberts Oskars Komarovskis", Part number=MIC5504, Space heritage=false, Verified=false
U2: "4.5-V to 18-V Input, 2-A SynchronousStep-DownConverter", Manufacturer_Name="Texas Instruments", Datasheet Link=http://www.ti.com/lit/gpn/tps54227, Farnell Order Nr=3007320, Height=1.7mm, Manufacturer_Part_Number=TPS54227DDAR, PartNumber=TPS54227DDAR
U3: "Medium-density performance line ARM®-based 32-bit MCU with 64 or 128 KB Flash, USB, CAN, 7 timers, 2 ADCs, 9 com. interfaces", ComponentLink1Description=Datasheet, ComponentLink1URL=https://4donline.ihs.com/images/VipMasterIC/IC/SGST/SGST-S-A0001117293/SGST-S-A0001117293-1.pdf?hkey=6D3A4C79FDBF58556ACFDE234799DDF0, Drawn by="Roberts Oskars Komarovskis", Farnell Order Nr=3129750, PartNumber=STM32F103R8T6
U4: "SO72xSingleChannelHigh-SpeedDigitalIsolators", Manufacturer_Name="Texas Instruments", Datasheet Link=http://www.ti.com/lit/gpn/ISO721, Farnell Order Nr=3124779, Height=1.75mm, Manufacturer_Part_Number=ISO721DR, PartNumber=ISO721DR
U5_WheelMot1 U5_WheelMot2 U5_WheelMot3: "DRV8874H-BridgeMotorDriverWith IntegratedCurrentSenseand Regulation", Manufacturer_Name="Texas Instruments", ComponentLink1Description=Datasheet, ComponentLink1URL=https://www.ti.com/lit/gpn/DRV8874, Datasheet Link=https://www.ti.com/lit/gpn/DRV8874, Height=1.2mm, Manufacturer_Part_Number=DRV8874PWPR
U6_WheelMot1 U6_WheelMot2 U6_WheelMot3: library part SI8660, "Low Power Six-Channel Digital Isolator", Manufacturer_Name="Silicon Labs", Manufacturer_Part_Number=SI8661BB-B-IU, Mouser2 Part Number=634-SI8661BB-B-IU, ComponentLink1Description=Datasheet, ComponentLink1URL=https://4donline.ihs.com/images/VipMasterIC/IC/SILC/SILC-S-A0009375737/SILC-S-A0009375737-1.pdf?hkey=6D3A4C79FDBF58556ACFDE234799DDF0, Datasheet Link=https://componentsearchengine.com//SI8661BB-B-IU.pdf, Farnell Order Nr=2423337, Height=1.75mm, Mouser2 Price/Stock=https://www.mouser.com/Search/Refine.aspx?Keyword=634-SI8661BB-B-IU, PartNumber=SI8660BB-B-IU_1
JP1 JP2 JP3 JP4: Drawn by="Erik Ilbis"

## Free pads (board coordinates)
  round 0 hole 3.2 unplated: 6(0,0) 7(-66.416,-44.8)

## Via types
v1: diameter 0.7, hole 0.3, Top Layer to Bottom Layer, 256 vias
v2: diameter 1, hole 0.5, Top Layer to Bottom Layer, 2 vias

## Nets (pads, with @x,y where several pads share a name; then routed paths per layer and width w, separated by ;. In a path a pad name is that pad's centre, name@x,y a point inside that pad or via, vN(x,y) a via of type N, cw(c..) or ccw(c..) an arc to the next point about the centre after c; other vN are vias at no path point)
3V3: C2.2 C11.2 C12.2 C13.2 C14.2 C15.2 C16.2 C17.2 C26_WheelMot1.2 C26_WheelMot2.2 C26_WheelMot3.2 C32.2 J1_WheelMot1.2 J1_WheelMot2.2 J1_WheelMot3.2 JP1.1 JP4.2 JP4.4 R2.2 U1.5 U3.1 U3.13 U3.19 U3.32 U3.48 U3.64 U4.1 U4.3 U6_WheelMot1.1 U6_WheelMot2.1 U6_WheelMot3.1 | length 44.9
  Top Layer w0.254: U3.32@-48.241,-16.787 v1@-48.241,-13.525 ; U3.19@-41.741,-16.787 v1(-41.741,-13.555) ; U3.1@-38.753,-26.275 -37.325,-26.275 -37.125,-26.475 v1(-37.1,-26.475) ; U3.13@-38.753,-20.275 -35.334,-20.275 C16.2@-35.309,-20.3 -35.141,-20.132 v1(-35.141,-19.2) -34.966,-19.025 -34.416,-19.025 -34.263,-18.872 U6_WheelMot3.1@-32.491,-18.872
  Top Layer w0.4: R2.2@-56.016,-27.525 -55.266,-27.525 v1(-54.866,-27.125) ; v1(-50.316,-30.5) -50.316,-27.55 C13.2@-50.291,-27.525 -50.291,-26.337 U3.48@-50.279,-26.325 ; U3.64@-40.691,-28.3 C12.2@-39.591,-28.3 ; v1(-35.4,-26) -34.94,-26 -34.255,-25.315 U6_WheelMot2.1@-32.502,-25.315
  Top Layer w0.5: v1(-36.116,-31.862) -32.788,-31.862 U6_WheelMot1.1@-32.597,-32.053
  Top Layer w0.6: C12.2@-39.591,-28.3 -39.554,-28.263 v1(-38.116,-28.263)
  Bottom Layer w0.254: v1(-36.116,-31.862) -36.116,-29.426 -35.715,-29.025 -32.703,-29.025 U4.3@-32.491,-29.237
  Bottom Layer w0.5: v1(-36.116,-31.862) -32.576,-31.862 U4.1@-32.491,-31.777
  Bottom Layer w1.5: U1.5@-49.446,-22.225 -46.475,-22.225 -46.5,-22.2 C2.2@-47.916,-22.2
  other v1: -46.741,-22 -45.941,-22 -48.266,-13.525
5V: C1.2 D1.5 F1.2 U1.1 U1.3 | length 12.3
  Top Layer w0.6: D1.5@-54.496,-24.675 -53.616,-24.675 v1@-53.591,-24.7
  Bottom Layer w0.254: U1.1@-52.066,-22.225 -51.216,-22.225 -50.991,-22 -50.991,-20.6 -51.266,-20.325 U1.3@-52.066,-20.325
  Bottom Layer w0.4: F1.2@-55.541,-22.375 -55.541,-24.1 -54.966,-24.675 v1(-53.591,-24.675)
  Bottom Layer w1: F1.2@-55.541,-22.375 -55.016,-22.9 -52.766,-22.9 U1.1@-52.241,-22.375
5V_B: C20.2 C21.2 C22.2 C27_WheelMot1.2 C27_WheelMot2.2 C27_WheelMot3.2 C28.2 C29.2 C33.2 JP2.2 L1.2 R1.2 R8.2 R9_WheelMot1.2 R9_WheelMot2.2 R9_WheelMot3.2 R10_WheelMot1.2 R10_WheelMot2.2 R10_WheelMot3.2 R11_WheelMot1.2 R11_WheelMot2.2 R11_WheelMot3.2 U4.8 U5_WheelMot1.5 U5_WheelMot2.5 U5_WheelMot3.5 U6_WheelMot1.16 U6_WheelMot2.16 U6_WheelMot3.16 | length 129.8
  Top Layer w0.254: U6_WheelMot3.16@-27.573,-18.872 U6_WheelMot3.16@-27.069,-18.872 -24.466,-18.872 v1@-24.268,-18.673 ; v1(-25.119,-37.25) -24.824,-36.955 R8.2@-24.004,-36.955 ; v1(-11.341,-19.7) -7.466,-19.7 R11_WheelMot2.2@-7.441,-19.675 ; v1(-11.316,-32.925) -7.641,-32.925 R11_WheelMot1.2@-7.366,-33.2 ; v1(-11.061,-6.475) -7.241,-6.475 R11_WheelMot3.2@-7.166,-6.55
  Top Layer w0.4: U6_WheelMot1.16@-27.141,-32.087 -25.741,-32.087 -25.491,-31.837 C27_WheelMot1.2@-25.291,-31.837 -24.491,-31.837 -23.866,-31.212 v1(-23.866,-30.837) ; U6_WheelMot2.16@-27.08,-25.315 -24.369,-25.315 -23.891,-24.837 v1(-23.891,-24.237)
  Power w0.254: v1(-11.341,-19.7) -8.866,-19.7 -6.941,-17.775 v1(-6.941,-16.475) ; v1(-11.316,-32.925) -8.275,-32.925 -7.05,-31.7 -7.05,-29.941 v1(-7.066,-29.925) ; v1(-11.061,-6.475) -8.334,-6.475 -7.034,-5.175 -7.034,-3.268 v1(-7.016,-3.25)
  Bottom Layer w0.254: U5_WheelMot1.5@-7.166,-31.225 -7.066,-31.125 v1(-7.066,-29.925) ; U5_WheelMot2.5@-7.141,-17.975 -7.043,-17.877 -7.043,-16.577 v1(-6.941,-16.475) ; U5_WheelMot3.5@-7.066,-5.1 U5_WheelMot3.5@-6.989,-5.023 ; U5_WheelMot3.5@-7.016,-5.023 -7.041,-4.998 -7.016,-4.973 v1(-7.016,-3.25)
  Bottom Layer w0.4: R1.2@-29.098,-13.48 -27.474,-13.48 L1.2@-26.519,-12.525 ; U4.8@-27.067,-31.777 -23.377,-31.777 -23.3,-31.7
  Bottom Layer w1: -26.875,-40.8 -26.854,-40.821 JP2.2@-26.854,-42.375 ; -24.4,-21.15 -13.835,-21.15 ; v1(-11.341,-19.7) -12.385,-19.7 -12.75,-20.065 ; v1(-11.316,-32.925) -12.725,-31.516 -12.725,-22.26 -13.835,-21.15 ; v1(-11.061,-6.475) -12.75,-8.164 -12.75,-20.065 ; -13.835,-21.15 -12.75,-20.065
  Bottom Layer w2: -26.875,-40.8 -26.875,-39.638 -23.3,-36.063 -23.3,-31.7 -23.3,-28.175 -24.4,-27.075 -24.4,-21.15 -24.4,-17.875 -24.275,-17.75 -24.275,-13.85 -25.6,-12.525 L1.2@-26.519,-12.525
  other v1: -24.369,-18.572
BAT: C3.2 C4.2 C5.2 C9.2 C10.2 C19.2 C24_WheelMot1.2 C24_WheelMot2.2 C24_WheelMot3.2 C25_WheelMot1.2 C25_WheelMot2.2 C25_WheelMot3.2 C30_WheelMot1.1 C30_WheelMot2.1 C30_WheelMot3.1 C31_WheelMot1.1 C31_WheelMot2.1 C31_WheelMot3.1 D7.2 Q1.1 U2.1 U2.8 U5_WheelMot1.11 U5_WheelMot2.11 U5_WheelMot3.11 | length 33.2
  Top Layer w1: U2.1@-28.087,-11.525 U2.8@-22.663,-11.525 U2.8@-22.369,-11.525 ; C19.2@-24.369,-8 C3.2@-24.369,-6
  Top Layer w2: -35.713,-10.05 -35.713,-9.35 -35.665,-9.213 -35.628,-9.107 -35.494,-8.723 v1@-35.416,-8.5 ; -25.119,-11 -25.119,-8.025 v1(-25.119,-4.31)
  Bottom Layer w0.45: U5_WheelMot1.11@-6.516,-37.776 -6.516,-39.234 ; U5_WheelMot2.11@-6.491,-24.213 -6.491,-25.609 ; U5_WheelMot3.11@-6.416,-10.976 -6.416,-12.478 ; C24_WheelMot1.2@-6.316,-40.6 -6.516,-40.4 -6.516,-39.234 ; C24_WheelMot2.2@-6.316,-26.8 -6.491,-26.625 C24_WheelMot2.2@-6.491,-26.575 ; C24_WheelMot3.2@-6.216,-13.75 -6.416,-13.55 -6.416,-12.478 ; C24_WheelMot1.2@-6.125,-40.4 -6.125,-39.625 -6.516,-39.234 ; C24_WheelMot3.2@-6.025,-13.475 -6.025,-12.868 -6.416,-12.478 ; C24_WheelMot2.2@-6.491,-26.575 -6.491,-25.609 ; C24_WheelMot2.2@-6.491,-26.575 C24_WheelMot2.2@-6.291,-26.775 -6.15,-26.634 -6.15,-25.95 -6.491,-25.609
  Bottom Layer w0.8: C25_WheelMot1.2@-6.316,-42.266 C24_WheelMot1.2@-6.316,-40.6 ; C25_WheelMot2.2@-6.316,-28.215 -6.316,-26.8 C24_WheelMot2.2@-6.291,-26.775 ; C25_WheelMot3.2@-6.216,-15.25 C24_WheelMot3.2@-6.216,-13.75
  Bottom Layer w1: C25_WheelMot1.2@-6.325,-42.275 C25_WheelMot1.2@-6.316,-42.266
  other v1: -10.712,-43.138 -10.75,-42.1 -10.775,-41.05 -10.85,-40.075 -10.8,-29.675 -10.837,-28.637 -10.862,-27.587 -10.937,-26.612 -10.662,-16.313 -10.7,-15.275 -10.725,-14.225 -10.8,-13.25 -34.841,-9.5 -36.366,-8.85 -35.416,-8.75 -34.416,-8.75 -36.013,-8 -34.916,-8 -25.666,-5 -24.416,-5 -25.666,-3.535 -24.666,-3.5
BAT_PRE: J2.1 Q1.3 | length 6.4
  Top Layer w1: -37.548,-11.165 Q1.3@-37.548,-10.515
  Top Layer w1.5: Q1.3@-37.816,-10.75 -37.816,-6.906 J2.1@-36.486,-5.575
  other v1: -37.48,-5.431 -35.08,-5.331 -36.18,-4.331 -37.555,-3.331 -35.08,-3.231
DBG_1: R4.2 U3.56 | length 8.1
  Top Layer w0.254: R4.2@-44.741,-36.375 U3.56@-44.741,-28.263
DBG_2: R5.2 U3.57 | length 8.7
  Top Layer w0.254: U3.57@-44.241,-28.263 -44.241,-35.062 R5.2@-42.929,-36.375
DBG_3: R6.2 U3.62 | length 8.3
  Top Layer w0.254: U3.62@-41.741,-28.263 -41.741,-29.85 -41.229,-30.362 R6.2@-41.229,-36.375
EN_B_WheelMot1: R10_WheelMot1.1 U5_WheelMot1.3 U6_WheelMot1.13 | length 23.1
  Top Layer w0.254: U6_WheelMot1.13@-27.141,-33.991 -22.729,-33.991 -20.908,-32.17 -9.42,-32.17 ; -9.42,-32.154 R10_WheelMot1.1@-8.766,-31.5 -8.491,-31.225 v1(-8.491,-29.925)
  Bottom Layer w0.254: v1(-8.491,-29.925) -8.491,-31.875 U5_WheelMot1.3@-8.466,-31.9
EN_B_WheelMot2: R10_WheelMot2.1 U5_WheelMot2.3 U6_WheelMot2.13 | length 26.2
  Top Layer w0.254: U6_WheelMot2.13@-27.08,-27.219 -19.181,-27.219 -12.25,-20.288 -12.25,-19.34 -10.935,-18.025 -8.891,-18.025 R10_WheelMot2.1@-8.841,-17.975 -8.841,-16.775 v1(-8.541,-16.475)
  Bottom Layer w0.254: v1(-8.541,-16.475) -8.541,-17.275 -8.441,-17.375 U5_WheelMot2.3@-8.441,-18.337
EN_B_WheelMot3: R10_WheelMot3.1 U5_WheelMot3.3 U6_WheelMot3.13 | length 31.6
  Top Layer w0.254: U6_WheelMot3.13@-27.063,-20.76 -27.053,-20.76 U6_WheelMot3.13@-27.069,-20.776 -20.892,-20.776 -11.866,-11.751 -11.866,-6.323 -10.393,-4.85 R10_WheelMot3.1@-8.566,-4.85 -8.566,-3.375 v1(-8.541,-3.35)
  Bottom Layer w0.254: v1(-8.541,-3.35) -8.441,-3.45 -8.441,-5.025 U5_WheelMot3.3@-8.366,-5.1
FREE1: JP4.1 U3.40 | length 12.9
  Top Layer w0.254: JP4.1@-61.591,-18.56 -59.154,-18.56 -55.439,-22.275 U3.40@-50.229,-22.275